# EAGLE board Full (EAGLE 9.6.2), part 1 of 2

Size 160 x 0 mm. Coordinates in mm from the lower left corner, seen from the top.
Outline: 0,0 160,0
Copper layers (1*16): Top 0.035mm / dielectric 1.5mm / Bottom 0.035mm
Design rules "default": minimum track width 6mil, minimum drill 0.35mm, track to track 6mil, track to pad 6mil, pad to pad 6mil, via to via 6mil, smd to smd 6mil, copper to edge 40mil, drill to drill 6mil, minimum pad ring 10mil, minimum via ring 8mil, stop-mask expansion 4mil, vias tented up to drill 0mil, thermal gap 10mil

## Footprints (pad centres in the part's own frame; a part is rotated, then mirrored left to right if it is on the bottom)
DIL14 = drill 0.813 long: 1 -7.62,-3.81; 2 -5.08,-3.81; 3 -2.54,-3.81; 4 0,-3.81; 5 2.54,-3.81; 6 5.08,-3.81; 7 7.62,-3.81; 8 7.62,3.81; 9 5.08,3.81; 10 2.54,3.81; 11 0,3.81; 12 -2.54,3.81; 13 -5.08,3.81; 14 -7.62,3.81
DIL16 = drill 0.813 long: 1 -8.89,-3.81; 2 -6.35,-3.81; 3 -3.81,-3.81; 4 -1.27,-3.81; 5 1.27,-3.81; 6 3.81,-3.81; 7 6.35,-3.81; 8 8.89,-3.81; 9 8.89,3.81; 10 6.35,3.81; 11 3.81,3.81; 12 1.27,3.81; 13 -1.27,3.81; 14 -3.81,3.81; 15 -6.35,3.81; 16 -8.89,3.81
DIL08 = drill 0.813 pad 1.27: 1 -3.81,-3.81; 2 -1.27,-3.81; 3 1.27,-3.81; 4 3.81,-3.81; 5 3.81,3.81; 6 1.27,3.81; 7 -1.27,3.81; 8 -3.81,3.81
E2-5 = drill 0.813 pad 1.27: + -1.016,0 | drill 0.813 pad 1.27 octagon: - 1.016,0
EDG-01 = drill 0.813 long: 1 0,-3.81; 2 0,3.81
B3F-10XX = drill 1.016 long: 1 -3.251,2.261; 2 3.251,2.261; 3 -3.251,-2.261; 4 3.251,-2.261
LED5MM = drill 0.813 octagon: A -1.27,0; K 1.27,0
SSW-111-02-G-S = drill 1 pad 1.5 octagon: 1 -12.7,0; 2 -10.16,0; 3 -7.62,0; 4 -5.08,0; 5 -2.54,0; 6 0,0; 7 2.54,0; 8 5.08,0; 9 7.62,0; 10 10.16,0; 11 12.7,0
RJ9W = drill 0.813 long: A 2.54,0.635; E -2.54,0.635; S 0,0.635
DIL28-6 = drill 0.813 long: 1 -16.51,-7.62; 2 -13.97,-7.62; 3 -11.43,-7.62; 4 -8.89,-7.62; 5 -6.35,-7.62; 6 -3.81,-7.62; 7 -1.27,-7.62; 8 1.27,-7.62; 9 3.81,-7.62; 10 6.35,-7.62; 11 8.89,-7.62; 12 11.43,-7.62; 13 13.97,-7.62; 14 16.51,-7.62; 15 16.51,7.62; 16 13.97,7.62; 17 11.43,7.62; 18 8.89,7.62; 19 6.35,7.62; 20 3.81,7.62; 21 1.27,7.62; 22 -1.27,7.62; 23 -3.81,7.62; 24 -6.35,7.62; 25 -8.89,7.62; 26 -11.43,7.62; 27 -13.97,7.62; 28 -16.51,7.62
SSW-115-02-G-S = drill 1 pad 1.5 octagon: 1 -17.78,0; 2 -15.24,0; 3 -12.7,0; 4 -10.16,0; 5 -7.62,0; 6 -5.08,0; 7 -2.54,0; 8 0,0; 9 2.54,0; 10 5.08,0; 11 7.62,0; 12 10.16,0; 13 12.7,0; 14 15.24,0; 15 17.78,0
LED3MM = drill 0.813 octagon: A -1.27,0; K 1.27,0
228-1277-00-0602J = drill 0.9 long: 1 -16.51,-7.62; 2 -13.97,-7.62; 3 -11.43,-7.62; 4 -8.89,-7.62; 5 -6.35,-7.62; 6 -3.81,-7.62; 7 -1.27,-7.62; 8 1.27,-7.62; 9 3.81,-7.62; 10 6.35,-7.62; 11 8.89,-7.62; 12 11.43,-7.62; 13 13.97,-7.62; 14 16.51,-7.62; 15 16.51,7.62; 16 13.97,7.62; 17 11.43,7.62; 18 8.89,7.62; 19 6.35,7.62; 20 3.81,7.62; 21 1.27,7.62; 22 -1.27,7.62; 23 -3.81,7.62; 24 -6.35,7.62; 25 -8.89,7.62; 26 -11.43,7.62; 27 -13.97,7.62; 28 -16.51,7.62 | hole 2: 21.24,0; -24.74,0
DIL20 = drill 0.813 long: 1 -11.43,-3.81; 2 -8.89,-3.81; 3 -6.35,-3.81; 4 -3.81,-3.81; 5 -1.27,-3.81; 6 1.27,-3.81; 7 3.81,-3.81; 8 6.35,-3.81; 9 8.89,-3.81; 10 11.43,-3.81; 11 11.43,3.81; 12 8.89,3.81; 13 6.35,3.81; 14 3.81,3.81; 15 1.27,3.81; 16 -1.27,3.81; 17 -3.81,3.81; 18 -6.35,3.81; 19 -8.89,3.81; 20 -11.43,3.81
0204/7 = drill 0.813 octagon: 1 -3.81,0; 2 3.81,0
DIL28-4 = drill 0.813 long: 1 -16.51,-5.08; 2 -13.97,-5.08; 3 -11.43,-5.08; 4 -8.89,-5.08; 5 -6.35,-5.08; 6 -3.81,-5.08; 7 -1.27,-5.08; 8 1.27,-5.08; 9 3.81,-5.08; 10 6.35,-5.08; 11 8.89,-5.08; 12 11.43,-5.08; 13 13.97,-5.08; 14 16.51,-5.08; 15 16.51,5.08; 16 13.97,5.08; 17 11.43,5.08; 18 8.89,5.08; 19 6.35,5.08; 20 3.81,5.08; 21 1.27,5.08; 22 -1.27,5.08; 23 -3.81,5.08; 24 -6.35,5.08; 25 -8.89,5.08; 26 -11.43,5.08; 27 -13.97,5.08; 28 -16.51,5.08
SSW-103-02-G-S = drill 1 pad 1.5 octagon: 1 -2.54,0; 2 0,0; 3 2.54,0

## Placement (x,y rotation side)
4_INP_OR_GATE  4072N  [DIL14]  -127,167.64 0 top  (outside the outline)
ADDER_LOWER  74LS283N  [DIL16]  -161.29,167.64 0 top  (outside the outline)
ADDER_UPPER  74LS283N  [DIL16]  -217.17,167.64 0 top  (outside the outline)
ADDR_MEM_REG_LOWER  74LS173N  [DIL16]  46.99,179.07 180 top  (outside the outline)
ADDR_MEM_REG_UPPER  74LS173N  [DIL16]  24.13,179.07 180 top  (outside the outline)
ADDR_REG_A_LOWER  74LS173N  [DIL16]  228.6,231.14 270 top  (outside the outline)
ADDR_REG_A_UPPER  74LS173N  [DIL16]  228.6,254 270 top  (outside the outline)
ADDR_REG_CALC_LOWER  74LS173N  [DIL16]  228.6,177.8 270 top  (outside the outline)
ADDR_REG_CALC_UPPER  74LS173N  [DIL16]  228.6,200.66 270 top  (outside the outline)
ADDR_REG_PARAM_LOWER  74LS173N  [DIL16]  -90.17,86.36 0 top  (outside the outline)
ADDR_REG_PARAM_UPPER  74LS173N  [DIL16]  -184.15,86.36 0 top  (outside the outline)
AND_GATE1_  74LS08N  [DIL14]  -124.46,187.96 0 top  (outside the outline)
AND_GATE2_  74LS08N  [DIL14]  -144.78,187.96 0 top  (outside the outline)
AND_GATE3_  74LS08N  [DIL14]  -165.1,187.96 0 top  (outside the outline)
AND_GATE4_  74LS08N  [DIL14]  -185.42,187.96 0 top  (outside the outline)
AND_GATE_  74LS08N  [DIL14]  29.21,250.19 270 top  (outside the outline)
AUTO_CLOCK  NE555N  [DIL08]  16.51,264.16 0 top  (outside the outline)
BRANCH_SELECTOR  74HC139N  [DIL16]  -204.47,142.24 0 top  (outside the outline)
C1  4.7uF  [E2-5]  15.24,256.54 270 top  (outside the outline)
C2  0.1uF  [E2-5]  15.24,250.19 90 top  (outside the outline)
C3  0.1uF  [E2-5]  -130.81,275.59 0 top  (outside the outline)
CLK_MODE  [EDG-01]  31.75,266.7 180 top  (outside the outline)
CLK_TRIGGER  [B3F-10XX]  6.35,254 270 top  (outside the outline)
CLOCK  [LED5MM]  39.37,242.57 0 top  (outside the outline)
DATABUS_1  LED  [LED5MM]  -186.69,222.25 0 top  (outside the outline)
DATABUS_2  [LED5MM]  -204.47,222.25 0 top  (outside the outline)
DATABUS_3  [LED5MM]  -222.25,222.25 0 top  (outside the outline)
DATABUS_4  [LED5MM]  -240.03,222.25 0 top  (outside the outline)
DATABUS_5  [LED5MM]  -26.67,229.87 0 top  (outside the outline)
DATABUS_6  [LED5MM]  -44.45,229.87 0 top  (outside the outline)
DATABUS_7  [LED5MM]  -62.23,229.87 0 top  (outside the outline)
DATABUS_8  [LED5MM]  -80.01,229.87 0 top  (outside the outline)
EXTENSION  SSW-111-02-G-S  [SSW-111-02-G-S]  -190.5,166.37 0 top  (outside the outline)
FLAG_1  [LED5MM]  -170.18,229.87 0 top  (outside the outline)
FLAG_2  [LED5MM]  -184.15,229.87 0 top  (outside the outline)
FLAG_3  [LED5MM]  -198.12,229.87 0 top  (outside the outline)
FLAG_4  [LED5MM]  -212.09,229.87 0 top  (outside the outline)
FLAG_5  [LED5MM]  -226.06,229.87 0 top  (outside the outline)
FLAG_6  [LED5MM]  -240.03,229.87 0 top  (outside the outline)
FLAG_7  [LED5MM]  -24.13,237.49 0 top  (outside the outline)
FLAG_8  [LED5MM]  -38.1,237.49 0 top  (outside the outline)
FLAG_REG_LOWER  74LS173N  [DIL16]  -69.85,167.64 0 top  (outside the outline)
FLAG_REG_UPPER  74LS173N  [DIL16]  -92.71,167.64 0 top  (outside the outline)
FREQUENCY  100k  [RJ9W]  10.16,278.13 0 top  (outside the outline)
INSRUCTION_REGISTER_SELECTOR_LOWER  74LS157N  [DIL16]  119.38,241.3 90 bottom  (outside the outline)
INSRUCTION_REGISTER_SELECTOR_UPPER  74LS157N  [DIL16]  119.38,218.44 90 bottom  (outside the outline)
INSTRUC_REGISTER_LOWER  74LS173N  [DIL16]  181.61,195.58 270 top  (outside the outline)
INSTRUC_REGISTER_UPPER  74LS173N  [DIL16]  181.61,171.45 270 top  (outside the outline)
INSTRUCTION_MEMORY_LOWER  AT28C64B  [DIL28-6]  154.94,226.06 90 top  (outside the outline)
INSTRUCTION_MEMORY_UPPER  AT28C64B  [DIL28-6]  154.94,184.15 90 top  (outside the outline)
INSTRUCTION_MEMORY_UPPER2  AT28C64B  [DIL28-6]  154.94,142.24 90 top  (outside the outline)
INSTRUCTIONS_EXTENSION  SSW-115-02-G-S  [SSW-115-02-G-S]  -124.46,85.09 0 top  (outside the outline)
INVERTED_CLK_LED  White  [LED5MM]  181.61,127 180 top  (outside the outline)
LED_A_REG_1  [LED5MM]  -74.93,214.63 0 top  (outside the outline)
LED_A_REG_2  [LED5MM]  -95.25,214.63 0 top  (outside the outline)
LED_A_REG_3  [LED5MM]  -115.57,214.63 0 top  (outside the outline)
LED_A_REG_4  [LED5MM]  -135.89,214.63 0 top  (outside the outline)
LED_A_REG_5  [LED5MM]  -156.21,214.63 0 top  (outside the outline)
LED_A_REG_6  [LED5MM]  -176.53,214.63 0 top  (outside the outline)
LED_A_REG_7  [LED5MM]  -196.85,214.63 0 top  (outside the outline)
LED_A_REG_8  [LED5MM]  -217.17,214.63 0 top  (outside the outline)
LED_B_REG_1  [LED5MM]  -237.49,214.63 0 top  (outside the outline)
LED_B_REG_2  [LED5MM]  -29.21,222.25 0 top  (outside the outline)
LED_B_REG_3  [LED5MM]  -49.53,222.25 0 top  (outside the outline)
LED_B_REG_4  [LED5MM]  -69.85,222.25 0 top  (outside the outline)
LED_B_REG_5  [LED5MM]  -90.17,222.25 0 top  (outside the outline)
LED_B_REG_6  [LED5MM]  -110.49,222.25 0 top  (outside the outline)
LED_B_REG_7  [LED5MM]  -130.81,222.25 0 top  (outside the outline)
LED_B_REG_8  [LED5MM]  -151.13,222.25 0 top  (outside the outline)
LOGIC_LED_1  [LED3MM]  -116.84,243.84 0 top  (outside the outline)
LOGIC_LED_2  [LED3MM]  -134.62,243.84 0 top  (outside the outline)
LOGIC_LED_3  [LED3MM]  -152.4,243.84 0 top  (outside the outline)
LOGIC_LED_4  [LED3MM]  -170.18,243.84 0 top  (outside the outline)
LOGIC_LED_5  [LED3MM]  -187.96,243.84 0 top  (outside the outline)
LOGIC_LED_6  [LED3MM]  -205.74,243.84 0 top  (outside the outline)
LOGIC_LED_7  [LED3MM]  -223.52,243.84 0 top  (outside the outline)
LOGIC_LED_8  [LED3MM]  -241.3,243.84 0 top  (outside the outline)
LOGIC_SELECTOR-AND/OR_LOWER  74LS157N  [DIL16]  -229.87,6.35 0 top  (outside the outline)
LOGIC_SELECTOR-AND/OR_UPPER  74LS157N  [DIL16]  -24.13,52.07 0 top  (outside the outline)
LOGIC_SELECTOR-XOR/NOT_LOWER  74LS157N  [DIL16]  -184.15,6.35 0 top  (outside the outline)
LOGIC_SELECTOR-XOR/NOT_UPPER  74LS157N  [DIL16]  -207.01,6.35 0 top  (outside the outline)
MEMORY  228-1277-00-0602J  [228-1277-00-0602J]  38.1,196.85 0 top  (outside the outline)
MICRO_COUNTER_LOWER  74LS161  [DIL16]  130.81,195.58 270 top  (outside the outline)
MICRO_COUNTER_UPPER  74LS161  [DIL16]  130.81,171.45 270 top  (outside the outline)
NOT_GATE1  74LS04N  [DIL14]  39.37,218.44 270 top  (outside the outline)
NOT_GATE2_  74LS04N  [DIL14]  -43.18,187.96 0 top  (outside the outline)
NOT_GATE3_  74LS04N  [DIL14]  -63.5,187.96 0 top  (outside the outline)
NOT_GATE4_  74LS04N  [DIL14]  76.2,257.81 270 top  (outside the outline)
NOT_GATE5_  74LS04N  [DIL14]  -104.14,187.96 0 top  (outside the outline)
NOT_GATE_  74LS04N  [DIL14]  -238.76,187.96 0 top  (outside the outline)
OR_GATE  74LS32N  [DIL14]  -134.62,203.2 0 top  (outside the outline)
OR_GATE1  74LS32N  [DIL14]  76.2,227.33 270 top  (outside the outline)
OR_GATE_2  74LS32N  [DIL14]  -43.18,203.2 0 top  (outside the outline)
OUTPUT_BUFFER_ALU  74LS245N  [DIL20]  -82.55,142.24 0 top  (outside the outline)
OUTPUT_BUFFER_CALC_REG  74LS245N  [DIL20]  205.74,187.96 90 top  (outside the outline)
OUTPUT_BUFFER_FLAGS  74HC245N  [DIL20]  -210.82,115.57 0 top  (outside the outline)
OUTPUT_BUFFER_INSTRUCTION  74LS245N  [DIL20]  124.46,139.7 90 top  (outside the outline)
OUTPUT_BUFFER_LOGIC  74LS245N  [DIL20]  -26.67,142.24 0 top  (outside the outline)
OUTPUT_BUFFER_MEMORY  74LS245N  [DIL20]  76.2,196.85 270 top  (outside the outline)
OUTPUT_BUFFER_PARAM_REG  74LS245N  [DIL20]  -77.47,52.07 0 top  (outside the outline)
OUTPUT_BUFFER_PC  74LS245N  [DIL20]  -156.21,142.24 0 top  (outside the outline)
OUTPUT_BUFFER_RAM  74HC245N  [DIL20]  78.74,74.93 270 top  (outside the outline)
OUTPUT_BUFFER_REG_A  74LS245N  [DIL20]  205.74,243.84 90 top  (outside the outline)
OVERFLOW_FLAG  [LED5MM]  -33.02,214.63 0 top  (outside the outline)
PARAM_LED_1  [LED3MM]  342.9,106.68 0 top  (outside the outline)
PARAM_LED_2  [LED3MM]  325.12,106.68 0 top  (outside the outline)
PARAM_LED_3  [LED3MM]  307.34,106.68 0 top  (outside the outline)
PARAM_LED_4  [LED3MM]  373.38,116.84 0 top  (outside the outline)
PARAM_LED_5  [LED3MM]  355.6,116.84 0 top  (outside the outline)
PARAM_LED_6  [LED3MM]  337.82,116.84 0 top  (outside the outline)
PARAM_LED_7  [LED3MM]  320.04,116.84 0 top  (outside the outline)
PARAM_LED_8  [LED3MM]  302.26,116.84 0 top  (outside the outline)
PC_1  [LED5MM]  -64.77,237.49 0 top  (outside the outline)
PC_2  [LED5MM]  -77.47,237.49 0 top  (outside the outline)
PC_3  [LED5MM]  -90.17,237.49 0 top  (outside the outline)
PC_4  [LED5MM]  -102.87,237.49 0 top  (outside the outline)
PC_5  [LED5MM]  -115.57,237.49 0 top  (outside the outline)
PC_6  [LED5MM]  -128.27,237.49 0 top  (outside the outline)
PC_7  [LED5MM]  -140.97,237.49 0 top  (outside the outline)
PC_8  [LED5MM]  -153.67,237.49 0 top  (outside the outline)
POSITIVE_FLAG  [LED5MM]  -54.61,214.63 0 top  (outside the outline)
PROGRAM_COUNTER_LOWER  74LS161  [DIL16]  -123.19,52.07 0 top  (outside the outline)
PROGRAM_COUNTER_UPPER  74LS161  [DIL16]  -166.37,52.07 0 top  (outside the outline)
R1  1k  [0204/7]  19.05,270.51 180 top  (outside the outline)
R2  1k  [0204/7]  5.08,245.11 0 top  (outside the outline)
R3  10k  [0204/7]  20.32,252.73 90 top  (outside the outline)
R4  220  [0204/7]  25.4,266.7 90 top  (outside the outline)
R5  ~220  [0204/7]  40.64,247.65 0 top  (outside the outline)
R6  ~220  [0204/7]  -191.77,247.65 0 top  (outside the outline)
R7  220  [0204/7]  13.97,273.05 0 top  (outside the outline)
R8  ~220  [0204/7]  -212.09,247.65 0 top  (outside the outline)
R9  ~220  [0204/7]  -222.25,247.65 0 top  (outside the outline)
R10  ~220  [0204/7]  -232.41,247.65 0 top  (outside the outline)
R11  ~220  [0204/7]  -242.57,247.65 0 top  (outside the outline)
R12  ~220  [0204/7]  -17.78,252.73 0 top  (outside the outline)
R13  ~220  [0204/7]  -27.94,252.73 0 top  (outside the outline)
R14  ~220  [0204/7]  -38.1,252.73 0 top  (outside the outline)
R15  ~220  [0204/7]  -48.26,252.73 0 top  (outside the outline)
R16  ~220  [0204/7]  -58.42,252.73 0 top  (outside the outline)
R17  ~220  [0204/7]  -68.58,252.73 0 top  (outside the outline)
R18  ~220  [0204/7]  -78.74,252.73 0 top  (outside the outline)
R19  ~220  [0204/7]  -88.9,252.73 0 top  (outside the outline)
R20  ~220  [0204/7]  -99.06,252.73 0 top  (outside the outline)
R21  ~220  [0204/7]  -109.22,252.73 0 top  (outside the outline)
R22  ~220  [0204/7]  -119.38,252.73 0 top  (outside the outline)
R23  ~220  [0204/7]  -129.54,252.73 0 top  (outside the outline)
R24  ~220  [0204/7]  -139.7,252.73 0 top  (outside the outline)
R25  ~220  [0204/7]  -149.86,252.73 0 top  (outside the outline)
R26  ~220  [0204/7]  -160.02,252.73 0 top  (outside the outline)
R27  ~220  [0204/7]  -170.18,252.73 0 top  (outside the outline)
R28  ~220  [0204/7]  -180.34,252.73 0 top  (outside the outline)
R29  ~220  [0204/7]  -190.5,252.73 0 top  (outside the outline)
R30  ~220  [0204/7]  -200.66,252.73 0 top  (outside the outline)
R31  ~220  [0204/7]  -210.82,252.73 0 top  (outside the outline)
R32  ~220  [0204/7]  63.5,116.84 90 top  (outside the outline)
R33  ~220  [0204/7]  58.42,116.84 90 top  (outside the outline)
R34  ~220  [0204/7]  53.34,116.84 90 top  (outside the outline)
R35  ~220  [0204/7]  48.26,116.84 90 top  (outside the outline)
R36  ~220  [0204/7]  43.18,116.84 90 top  (outside the outline)
R37  ~220  [0204/7]  38.1,116.84 90 top  (outside the outline)
R38  ~220  [0204/7]  33.02,116.84 90 top  (outside the outline)
R39  ~220  [0204/7]  27.94,116.84 90 top  (outside the outline)
R40  ~220  [0204/7]  149.86,97.79 270 top  (outside the outline)
R41  ~220  [0204/7]  157.48,97.79 270 top  (outside the outline)
R42  ~220  [0204/7]  165.1,97.79 270 top  (outside the outline)
R43  ~220  [0204/7]  172.72,97.79 270 top  (outside the outline)
R44  ~220  [0204/7]  180.34,97.79 270 top  (outside the outline)
R45  ~220  [0204/7]  173.99,127 0 top  (outside the outline)
R46  ~220  [0204/7]  -129.54,257.81 0 top  (outside the outline)
R47  ~220  [0204/7]  -139.7,257.81 0 top  (outside the outline)
R48  ~220  [0204/7]  -149.86,257.81 0 top  (outside the outline)
R49  ~220  [0204/7]  -160.02,257.81 0 top  (outside the outline)
R50  ~220  [0204/7]  -170.18,257.81 0 top  (outside the outline)
R51  ~220  [0204/7]  -180.34,257.81 0 top  (outside the outline)
R52  ~220  [0204/7]  -190.5,257.81 0 top  (outside the outline)
R53  ~220  [0204/7]  -200.66,257.81 0 top  (outside the outline)
R54  ~220  [0204/7]  -210.82,257.81 0 top  (outside the outline)
R55  ~220  [0204/7]  -220.98,257.81 0 top  (outside the outline)
R56  ~220  [0204/7]  -231.14,257.81 0 top  (outside the outline)
R57  ~220  [0204/7]  -241.3,257.81 0 top  (outside the outline)
R58  ~220  [0204/7]  -17.78,262.89 0 top  (outside the outline)
R59  ~220  [0204/7]  -27.94,262.89 0 top  (outside the outline)
R60  ~220  [0204/7]  -38.1,262.89 0 top  (outside the outline)
R61  ~220  [0204/7]  -48.26,262.89 0 top  (outside the outline)
R62  ~220  [0204/7]  -58.42,262.89 0 top  (outside the outline)
R63  ~220  [0204/7]  -68.58,262.89 0 top  (outside the outline)
R64  ~220  [0204/7]  -78.74,262.89 0 top  (outside the outline)
R65  ~220  [0204/7]  -88.9,262.89 0 top  (outside the outline)
R66  ~220  [0204/7]  -99.06,262.89 0 top  (outside the outline)
R67  ~220  [0204/7]  -109.22,262.89 0 top  (outside the outline)
R68  ~220  [0204/7]  -119.38,262.89 0 top  (outside the outline)
R69  ~220  [0204/7]  -129.54,262.89 0 top  (outside the outline)
R70  ~220  [0204/7]  -139.7,262.89 0 top  (outside the outline)
R71  ~220  [0204/7]  -149.86,262.89 0 top  (outside the outline)
R72  ~220  [0204/7]  -160.02,262.89 0 top  (outside the outline)
R73  ~220  [0204/7]  -170.18,262.89 0 top  (outside the outline)
R74  ~220  [0204/7]  -180.34,262.89 0 top  (outside the outline)
R75  ~220  [0204/7]  -190.5,262.89 0 top  (outside the outline)
R76  ~220  [0204/7]  -200.66,262.89 0 top  (outside the outline)
R77  ~220  [0204/7]  -210.82,262.89 0 top  (outside the outline)
R78  ~220  [0204/7]  -220.98,262.89 0 top  (outside the outline)
R79  ~220  [0204/7]  -231.14,262.89 0 top  (outside the outline)
R80  ~220  [0204/7]  -241.3,262.89 0 top  (outside the outline)
R81  ~220  [0204/7]  -17.78,267.97 0 top  (outside the outline)
RAM  71256SA15TPG  [DIL28-4]  46.99,72.39 270 top  (outside the outline)
RAM_ADDR_LOWER  74LS173N  [DIL16]  21.59,62.23 90 top  (outside the outline)
RAM_ADDR_UPPER  74LS173N  [DIL16]  21.59,85.09 90 top  (outside the outline)
RAM_LED_1  [LED3MM]  62.23,109.22 0 top  (outside the outline)
RAM_LED_2  [LED3MM]  57.15,109.22 0 top  (outside the outline)
RAM_LED_3  [LED3MM]  52.07,109.22 0 top  (outside the outline)
RAM_LED_4  [LED3MM]  46.99,109.22 0 top  (outside the outline)
RAM_LED_5  [LED3MM]  41.91,109.22 0 top  (outside the outline)
RAM_LED_6  [LED3MM]  36.83,109.22 0 top  (outside the outline)
RAM_LED_7  [LED3MM]  31.75,109.22 0 top  (outside the outline)
RAM_LED_8  [LED3MM]  26.67,109.22 0 top  (outside the outline)
RESET_PC  [B3F-10XX]  -198.12,201.93 0 top  (outside the outline)
RESET_REGS  [B3F-10XX]  -185.42,201.93 0 top  (outside the outline)
SELECTOR_LOGIC2_  74HC139N  [DIL16]  101.6,161.29 90 top  (outside the outline)
SELECTOR_LOGIC_  74HC139N  [DIL16]  137.16,110.49 90 top  (outside the outline)
STEPPER_CLOCK  NE555N  [DIL08]  16.51,242.57 0 top  (outside the outline)
SUBTRACT_INVRTR_LOWER_  74LS86N  [DIL14]  -236.22,52.07 0 top  (outside the outline)
SUBTRACT_INVRTR_LOWER_1  74LS86N  [DIL14]  -101.6,52.07 0 top  (outside the outline)
SUBTRACT_INVRTR_UPPER_  74LS86N  [DIL14]  -45.72,86.36 0 top  (outside the outline)
SUBTRACT_INVRTR_UPPER_1  74LS86N  [DIL14]  -144.78,52.07 0 top  (outside the outline)
USTEP_1  [LED5MM]  151.13,106.68 180 top  (outside the outline)
USTEP_2  [LED5MM]  158.75,106.68 180 top  (outside the outline)
USTEP_3  [LED5MM]  166.37,106.68 180 top  (outside the outline)
USTEP_4  [LED5MM]  173.99,106.68 180 top  (outside the outline)
USTEP_5  [LED5MM]  181.61,106.68 180 top  (outside the outline)
X1  SSW-103-02-G-S  [SSW-103-02-G-S]  -144.78,166.37 0 top  (outside the outline)
XOR_GATE_1  74LS86N  [DIL14]  -238.76,167.64 0 top  (outside the outline)
XOR_GATE_2  74LS86N  [DIL14]  -22.86,187.96 0 top  (outside the outline)
ZERO_FLAG  [LED5MM]  -168.91,222.25 0 top  (outside the outline)
ZERO_POS_FLAG_IDENTIFIER  744078N  [DIL14]  -187.96,52.07 0 top  (outside the outline)

## Library data of the parts
4_INP_OR_GATE = 40xx
ADDER_LOWER ADDER_UPPER ADDR_MEM_REG_LOWER ADDR_MEM_REG_UPPER ADDR_REG_A_LOWER ADDR_REG_A_UPPER ADDR_REG_CALC_LOWER ADDR_REG_CALC_UPPER ADDR_REG_PARAM_LOWER ADDR_REG_PARAM_UPPER AND_GATE1_ AND_GATE2_ AND_GATE3_ AND_GATE4_ AND_GATE_ BRANCH_SELECTOR FLAG_REG_LOWER FLAG_REG_UPPER INSRUCTION_REGISTER_SELECTOR_LOWER INSRUCTION_REGISTER_SELECTOR_UPPER INSTRUC_REGISTER_LOWER INSTRUC_REGISTER_UPPER LOGIC_SELECTOR-AND/OR_LOWER LOGIC_SELECTOR-AND/OR_UPPER LOGIC_SELECTOR-XOR/NOT_LOWER LOGIC_SELECTOR-XOR/NOT_UPPER NOT_GATE1 NOT_GATE2_ NOT_GATE3_ NOT_GATE5_ NOT_GATE_ OR_GATE OR_GATE1 OR_GATE_2 OUTPUT_BUFFER_ALU OUTPUT_BUFFER_CALC_REG OUTPUT_BUFFER_FLAGS OUTPUT_BUFFER_LOGIC OUTPUT_BUFFER_MEMORY OUTPUT_BUFFER_PARAM_REG OUTPUT_BUFFER_PC OUTPUT_BUFFER_RAM OUTPUT_BUFFER_REG_A RAM_ADDR_LOWER RAM_ADDR_UPPER SELECTOR_LOGIC2_ SELECTOR_LOGIC_ SUBTRACT_INVRTR_LOWER_ SUBTRACT_INVRTR_LOWER_1 SUBTRACT_INVRTR_UPPER_ SUBTRACT_INVRTR_UPPER_1 XOR_GATE_1 XOR_GATE_2 = 74xx-eu
AUTO_CLOCK STEPPER_CLOCK = linear
C1-C3 = rcl; SPICEPREFIX: C
CLK_MODE = special
CLK_TRIGGER RESET_PC RESET_REGS = switch-omron; MPN: B3F-1000; OC_FARNELL: 176432; OC_NEWARK: 36M3542
CLOCK DATABUS_1-DATABUS_8 FLAG_1-FLAG_8 INVERTED_CLK_LED LED_A_REG_1-LED_A_REG_8 LED_B_REG_1-LED_B_REG_8 LOGIC_LED_1-LOGIC_LED_8 OVERFLOW_FLAG PARAM_LED_1-PARAM_LED_8 PC_1-PC_8 POSITIVE_FLAG RAM_LED_1-RAM_LED_8 USTEP_1-USTEP_5 ZERO_FLAG = led
EXTENSION = con-samtec; MF: Samtec Inc.; MPN: SSW-111-02-G-S; OC_FARNELL: unknown; OC_NEWARK: 11P9498
FREQUENCY = pot
INSTRUCTION_MEMORY_LOWER INSTRUCTION_MEMORY_UPPER INSTRUCTION_MEMORY_UPPER2 MICRO_COUNTER_LOWER MICRO_COUNTER_UPPER PROGRAM_COUNTER_LOWER PROGRAM_COUNTER_UPPER RAM = ic-package
INSTRUCTIONS_EXTENSION = con-samtec; MF: Samtec Inc.; MPN: SSW-115-02-G-S; OC_FARNELL: unknown; OC_NEWARK: 11P9564
MEMORY = con-3m; MF: 3M; MPN: 228-1277-00-0602J; OC_FARNELL: 9897356; OC_NEWARK: 85K7825
NOT_GATE4_ = 74xx-eu; SPICEPREFIX: B
OUTPUT_BUFFER_INSTRUCTION = 74xx-us
R1-R81 = rcl; SPICEPREFIX: R
X1 = con-samtec; MF: Samtec Inc.; MPN: SSW-103-02-G-S; OC_FARNELL: unknown; OC_NEWARK: 11P9367
ZERO_POS_FLAG_IDENTIFIER = 74ttl-din

## Nets
1_PLACE [Databus]: ADDR_MEM_REG_LOWER.11 ADDR_REG_A_LOWER.11 ADDR_REG_CALC_LOWER.11 ADDR_REG_PARAM_LOWER.11 DATABUS_1.A EXTENSION.1 INSTRUC_REGISTER_LOWER.11 MICRO_COUNTER_LOWER.3 OUTPUT_BUFFER_ALU.2 OUTPUT_BUFFER_CALC_REG.11 OUTPUT_BUFFER_FLAGS.2 OUTPUT_BUFFER_INSTRUCTION.11 OUTPUT_BUFFER_LOGIC.18 OUTPUT_BUFFER_MEMORY.11 OUTPUT_BUFFER_PARAM_REG.11 OUTPUT_BUFFER_PC.11 OUTPUT_BUFFER_RAM.18 OUTPUT_BUFFER_REG_A.11 PROGRAM_COUNTER_LOWER.3 RAM_ADDR_LOWER.14 XOR_GATE_1.2
2_PLACE [Databus]: ADDR_MEM_REG_LOWER.12 ADDR_REG_A_LOWER.12 ADDR_REG_CALC_LOWER.12 ADDR_REG_PARAM_LOWER.12 DATABUS_2.A EXTENSION.2 INSTRUC_REGISTER_LOWER.12 MICRO_COUNTER_LOWER.4 OUTPUT_BUFFER_ALU.3 OUTPUT_BUFFER_CALC_REG.12 OUTPUT_BUFFER_FLAGS.3 OUTPUT_BUFFER_INSTRUCTION.12 OUTPUT_BUFFER_LOGIC.17 OUTPUT_BUFFER_MEMORY.12 OUTPUT_BUFFER_PARAM_REG.12 OUTPUT_BUFFER_PC.12 OUTPUT_BUFFER_RAM.17 OUTPUT_BUFFER_REG_A.12 PROGRAM_COUNTER_LOWER.4 RAM_ADDR_LOWER.13 XOR_GATE_1.5
4_PLACE [Databus]: ADDR_MEM_REG_LOWER.13 ADDR_REG_A_LOWER.13 ADDR_REG_CALC_LOWER.13 ADDR_REG_PARAM_LOWER.13 DATABUS_3.A EXTENSION.3 INSTRUC_REGISTER_LOWER.13 MICRO_COUNTER_LOWER.5 OUTPUT_BUFFER_ALU.4 OUTPUT_BUFFER_CALC_REG.13 OUTPUT_BUFFER_FLAGS.4 OUTPUT_BUFFER_INSTRUCTION.13 OUTPUT_BUFFER_LOGIC.16 OUTPUT_BUFFER_MEMORY.13 OUTPUT_BUFFER_PARAM_REG.13 OUTPUT_BUFFER_PC.13 OUTPUT_BUFFER_RAM.16 OUTPUT_BUFFER_REG_A.13 PROGRAM_COUNTER_LOWER.5 RAM_ADDR_LOWER.12 XOR_GATE_1.10
8_PLACE [Databus]: ADDR_MEM_REG_LOWER.14 ADDR_REG_A_LOWER.14 ADDR_REG_CALC_LOWER.14 ADDR_REG_PARAM_LOWER.14 DATABUS_4.A EXTENSION.4 INSTRUC_REGISTER_LOWER.14 MICRO_COUNTER_LOWER.6 OUTPUT_BUFFER_ALU.5 OUTPUT_BUFFER_CALC_REG.14 OUTPUT_BUFFER_FLAGS.5 OUTPUT_BUFFER_INSTRUCTION.14 OUTPUT_BUFFER_LOGIC.15 OUTPUT_BUFFER_MEMORY.14 OUTPUT_BUFFER_PARAM_REG.14 OUTPUT_BUFFER_PC.14 OUTPUT_BUFFER_RAM.15 OUTPUT_BUFFER_REG_A.14 PROGRAM_COUNTER_LOWER.6 RAM_ADDR_LOWER.11 XOR_GATE_1.13
16_PLACE [Databus]: ADDR_MEM_REG_UPPER.11 ADDR_REG_A_UPPER.11 ADDR_REG_CALC_UPPER.11 ADDR_REG_PARAM_UPPER.11 DATABUS_5.A EXTENSION.5 INSTRUC_REGISTER_UPPER.11 MICRO_COUNTER_UPPER.3 OUTPUT_BUFFER_ALU.6 OUTPUT_BUFFER_CALC_REG.15 OUTPUT_BUFFER_FLAGS.6 OUTPUT_BUFFER_INSTRUCTION.15 OUTPUT_BUFFER_LOGIC.14 OUTPUT_BUFFER_MEMORY.15 OUTPUT_BUFFER_PARAM_REG.15 OUTPUT_BUFFER_PC.15 OUTPUT_BUFFER_RAM.14 OUTPUT_BUFFER_REG_A.15 PROGRAM_COUNTER_UPPER.3 RAM_ADDR_UPPER.14 XOR_GATE_2.2
32_PLACE [Databus]: ADDR_MEM_REG_UPPER.12 ADDR_REG_A_UPPER.12 ADDR_REG_CALC_UPPER.12 ADDR_REG_PARAM_UPPER.12 DATABUS_6.A EXTENSION.6 INSTRUC_REGISTER_UPPER.12 OUTPUT_BUFFER_ALU.7 OUTPUT_BUFFER_CALC_REG.16 OUTPUT_BUFFER_FLAGS.7 OUTPUT_BUFFER_INSTRUCTION.16 OUTPUT_BUFFER_LOGIC.13 OUTPUT_BUFFER_MEMORY.16 OUTPUT_BUFFER_PARAM_REG.16 OUTPUT_BUFFER_PC.16 OUTPUT_BUFFER_RAM.13 OUTPUT_BUFFER_REG_A.16 PROGRAM_COUNTER_UPPER.4 RAM_ADDR_UPPER.13 XOR_GATE_2.5
64_PLACE [Databus]: ADDR_MEM_REG_UPPER.13 ADDR_REG_A_UPPER.13 ADDR_REG_CALC_UPPER.13 ADDR_REG_PARAM_UPPER.13 DATABUS_7.A EXTENSION.7 INSTRUC_REGISTER_UPPER.13 OUTPUT_BUFFER_ALU.8 OUTPUT_BUFFER_CALC_REG.17 OUTPUT_BUFFER_FLAGS.8 OUTPUT_BUFFER_INSTRUCTION.17 OUTPUT_BUFFER_LOGIC.12 OUTPUT_BUFFER_MEMORY.17 OUTPUT_BUFFER_PARAM_REG.17 OUTPUT_BUFFER_PC.17 OUTPUT_BUFFER_RAM.12 OUTPUT_BUFFER_REG_A.17 PROGRAM_COUNTER_UPPER.5 RAM_ADDR_UPPER.12 XOR_GATE_2.10
128_PLACE [Databus]: ADDR_MEM_REG_UPPER.14 ADDR_REG_A_UPPER.14 ADDR_REG_CALC_UPPER.14 ADDR_REG_PARAM_UPPER.14 DATABUS_8.A EXTENSION.8 INSTRUC_REGISTER_UPPER.14 OUTPUT_BUFFER_ALU.9 OUTPUT_BUFFER_CALC_REG.18 OUTPUT_BUFFER_FLAGS.9 OUTPUT_BUFFER_INSTRUCTION.18 OUTPUT_BUFFER_LOGIC.11 OUTPUT_BUFFER_MEMORY.18 OUTPUT_BUFFER_PARAM_REG.18 OUTPUT_BUFFER_PC.18 OUTPUT_BUFFER_RAM.11 OUTPUT_BUFFER_REG_A.18 PROGRAM_COUNTER_UPPER.6 RAM_ADDR_UPPER.11
>0_FLAG: AND_GATE4_.5 POSITIVE_FLAG.A ZERO_POS_FLAG_IDENTIFIER.1
CALC_IN: ADDR_REG_CALC_LOWER.9 ADDR_REG_CALC_LOWER.10 ADDR_REG_CALC_UPPER.9 ADDR_REG_CALC_UPPER.10 SELECTOR_LOGIC2_.10
CALC_OUT: OUTPUT_BUFFER_CALC_REG.19 SELECTOR_LOGIC2_.11
CLOCK: ADDR_MEM_REG_LOWER.7 ADDR_MEM_REG_UPPER.7 ADDR_REG_A_LOWER.7 ADDR_REG_A_UPPER.7 ADDR_REG_CALC_LOWER.7 ADDR_REG_CALC_UPPER.7 ADDR_REG_PARAM_LOWER.7 ADDR_REG_PARAM_UPPER.7 AND_GATE_.8 CLOCK.A EXTENSION.9 FLAG_REG_LOWER.7 FLAG_REG_UPPER.7 INSTRUC_REGISTER_LOWER.7 INSTRUC_REGISTER_UPPER.7 NOT_GATE1.11 PROGRAM_COUNTER_LOWER.2 PROGRAM_COUNTER_UPPER.2 RAM_ADDR_LOWER.7 RAM_ADDR_UPPER.7
CLR_REG: ADDR_MEM_REG_LOWER.15 ADDR_MEM_REG_UPPER.15 ADDR_REG_A_LOWER.15 ADDR_REG_A_UPPER.15 ADDR_REG_CALC_LOWER.15 ADDR_REG_CALC_UPPER.15 ADDR_REG_PARAM_LOWER.15 ADDR_REG_PARAM_UPPER.15 FLAG_REG_LOWER.15 FLAG_REG_UPPER.15 INSTRUC_REGISTER_LOWER.15 INSTRUC_REGISTER_UPPER.15 R81.1 RAM_ADDR_LOWER.15 RAM_ADDR_UPPER.15 RESET_REGS.4
COUNTERS_CLEAR: AND_GATE4_.10 PROGRAM_COUNTER_LOWER.1 PROGRAM_COUNTER_UPPER.1 R80.1 RESET_PC.1
CTRL_SIG_1: INSRUCTION_REGISTER_SELECTOR_LOWER.13 INSTRUCTION_MEMORY_LOWER.11 OUTPUT_BUFFER_INSTRUCTION.2
CTRL_SIG_2: INSRUCTION_REGISTER_SELECTOR_LOWER.10 INSTRUCTION_MEMORY_LOWER.12 OUTPUT_BUFFER_INSTRUCTION.3
CTRL_SIG_3: INSRUCTION_REGISTER_SELECTOR_LOWER.6 INSTRUCTION_MEMORY_LOWER.13 OUTPUT_BUFFER_INSTRUCTION.4
CTRL_SIG_4: INSRUCTION_REGISTER_SELECTOR_LOWER.3 INSTRUCTION_MEMORY_LOWER.15 OUTPUT_BUFFER_INSTRUCTION.5
CTRL_SIG_5: INSRUCTION_REGISTER_SELECTOR_UPPER.13 INSTRUCTION_MEMORY_LOWER.16 OUTPUT_BUFFER_INSTRUCTION.6
CTRL_SIG_6: INSRUCTION_REGISTER_SELECTOR_UPPER.10 INSTRUCTION_MEMORY_LOWER.17 OUTPUT_BUFFER_INSTRUCTION.7
CTRL_SIG_7: INSRUCTION_REGISTER_SELECTOR_UPPER.6 INSTRUCTION_MEMORY_LOWER.18 OUTPUT_BUFFER_INSTRUCTION.8
CTRL_SIG_8: INSRUCTION_REGISTER_SELECTOR_UPPER.3 INSTRUCTION_MEMORY_LOWER.19 OUTPUT_BUFFER_INSTRUCTION.9
CTRL_SIG_9: INSTRUCTION_MEMORY_UPPER.11 SELECTOR_LOGIC2_.13
CTRL_SIG_10: INSTRUCTION_MEMORY_UPPER.12 SELECTOR_LOGIC2_.14
CTRL_SIG_11: INSTRUCTION_MEMORY_UPPER.13 NOT_GATE3_.3
CTRL_SIG_12: ADDER_LOWER.7 INSTRUCTION_MEMORY_UPPER.15 SUBTRACT_INVRTR_LOWER_.1 SUBTRACT_INVRTR_LOWER_.4 SUBTRACT_INVRTR_LOWER_.9 SUBTRACT_INVRTR_LOWER_.12 SUBTRACT_INVRTR_UPPER_.1 SUBTRACT_INVRTR_UPPER_.4 SUBTRACT_INVRTR_UPPER_.9 SUBTRACT_INVRTR_UPPER_.12
CTRL_SIG_13: INSTRUCTION_MEMORY_UPPER.16 NOT_GATE1.13
CTRL_SIG_14: INSTRUCTION_MEMORY_UPPER.17 NOT_GATE4_.11
CTRL_SIG_15: INSTRUCTION_MEMORY_UPPER.18 SELECTOR_LOGIC2_.2
CTRL_SIG_16: INSTRUCTION_MEMORY_UPPER.19 SELECTOR_LOGIC2_.3
CTRL_SIG_17_(FLAG_OUT): INSTRUCTION_MEMORY_UPPER2.11 NOT_GATE_.11
CTRL_SIG_18_(LOGIC_SELECT_1): INSTRUCTION_MEMORY_UPPER2.12 LOGIC_SELECTOR-AND/OR_LOWER.1 LOGIC_SELECTOR-AND/OR_UPPER.1 LOGIC_SELECTOR-XOR/NOT_LOWER.1 LOGIC_SELECTOR-XOR/NOT_UPPER.1 SELECTOR_LOGIC_.2
CTRL_SIG_19_(LOGIC_SELECT_2): INSTRUCTION_MEMORY_UPPER2.13 SELECTOR_LOGIC_.3
CTRL_SIG_20_(LOGIC_OUT): INSTRUCTION_MEMORY_UPPER2.15 NOT_GATE_.13
CTRL_SIG_21_(P_REG_IN): INSTRUCTION_MEMORY_UPPER2.16 NOT_GATE2_.3
CTRL_SIG_22_(P_REG_OUT): INSTRUCTION_MEMORY_UPPER2.17 NOT_GATE2_.1
CTRL_SIG_23_(LOOP_CONTROL_B): BRANCH_SELECTOR.3 INSTRUCTION_MEMORY_UPPER2.18
CTRL_SIG_24_(LOOP_CONTROL_A): BRANCH_SELECTOR.2 INSTRUCTION_MEMORY_UPPER2.19
END_CRNT_CMD: AND_GATE4_.9 SELECTOR_LOGIC2_.9
END_CRNT_CMD&&BTN_PRESS: AND_GATE4_.8 MICRO_COUNTER_LOWER.1 MICRO_COUNTER_UPPER.1
GND: 4_INP_OR_GATE.7 ADDER_LOWER.8 ADDER_UPPER.8 ADDR_MEM_REG_LOWER.1 ADDR_MEM_REG_LOWER.2 ADDR_MEM_REG_LOWER.8 ADDR_MEM_REG_UPPER.1 ADDR_MEM_REG_UPPER.2 ADDR_MEM_REG_UPPER.8 ADDR_REG_A_LOWER.1 ADDR_REG_A_LOWER.2 ADDR_REG_A_LOWER.8 ADDR_REG_A_UPPER.1 ADDR_REG_A_UPPER.2 ADDR_REG_A_UPPER.8 ADDR_REG_CALC_LOWER.1 ADDR_REG_CALC_LOWER.2 ADDR_REG_CALC_LOWER.8 ADDR_REG_CALC_UPPER.1 ADDR_REG_CALC_UPPER.2 ADDR_REG_CALC_UPPER.8 ADDR_REG_PARAM_LOWER.1 ADDR_REG_PARAM_LOWER.2 ADDR_REG_PARAM_LOWER.8 ADDR_REG_PARAM_UPPER.1 ADDR_REG_PARAM_UPPER.2 ADDR_REG_PARAM_UPPER.8 AND_GATE1_.7 AND_GATE2_.7 AND_GATE3_.7 AND_GATE4_.7 AND_GATE_.7 AUTO_CLOCK.1 BRANCH_SELECTOR.1 BRANCH_SELECTOR.8 BRANCH_SELECTOR.15 C1.- C2.- C3.- CLK_TRIGGER.3 EXTENSION.11 FLAG_REG_LOWER.1 FLAG_REG_LOWER.2 FLAG_REG_LOWER.8 FLAG_REG_UPPER.1 FLAG_REG_UPPER.2 FLAG_REG_UPPER.8 INSRUCTION_REGISTER_SELECTOR_LOWER.2 INSRUCTION_REGISTER_SELECTOR_LOWER.5 INSRUCTION_REGISTER_SELECTOR_LOWER.8 INSRUCTION_REGISTER_SELECTOR_LOWER.11 INSRUCTION_REGISTER_SELECTOR_LOWER.14 INSRUCTION_REGISTER_SELECTOR_LOWER.15 INSRUCTION_REGISTER_SELECTOR_UPPER.2 INSRUCTION_REGISTER_SELECTOR_UPPER.5 INSRUCTION_REGISTER_SELECTOR_UPPER.8 INSRUCTION_REGISTER_SELECTOR_UPPER.11 INSRUCTION_REGISTER_SELECTOR_UPPER.14 INSRUCTION_REGISTER_SELECTOR_UPPER.15 INSTRUC_REGISTER_LOWER.1 INSTRUC_REGISTER_LOWER.2 INSTRUC_REGISTER_LOWER.8 INSTRUC_REGISTER_UPPER.1 INSTRUC_REGISTER_UPPER.2 INSTRUC_REGISTER_UPPER.8 INSTRUCTION_MEMORY_LOWER.14 INSTRUCTION_MEMORY_LOWER.20 INSTRUCTION_MEMORY_LOWER.22 INSTRUCTION_MEMORY_UPPER2.14 INSTRUCTION_MEMORY_UPPER2.20 INSTRUCTION_MEMORY_UPPER2.22 INSTRUCTION_MEMORY_UPPER.14 INSTRUCTION_MEMORY_UPPER.20 INSTRUCTION_MEMORY_UPPER.22 INSTRUCTIONS_EXTENSION.15 LOGIC_SELECTOR-AND/OR_LOWER.8 LOGIC_SELECTOR-AND/OR_UPPER.8 LOGIC_SELECTOR-XOR/NOT_LOWER.8 LOGIC_SELECTOR-XOR/NOT_UPPER.8 MEMORY.2 MEMORY.14 MEMORY.20 MEMORY.21 MEMORY.22 MEMORY.23 MEMORY.24 MICRO_COUNTER_LOWER.8 MICRO_COUNTER_UPPER.8 NOT_GATE1.7 NOT_GATE2_.7 NOT_GATE3_.7 NOT_GATE4_.7 NOT_GATE5_.7 NOT_GATE_.7 OR_GATE1.7 OR_GATE.7 OR_GATE_2.7 OUTPUT_BUFFER_ALU.1 OUTPUT_BUFFER_ALU.10 OUTPUT_BUFFER_CALC_REG.10 OUTPUT_BUFFER_FLAGS.1 OUTPUT_BUFFER_FLAGS.10 OUTPUT_BUFFER_INSTRUCTION.10 OUTPUT_BUFFER_LOGIC.10 OUTPUT_BUFFER_MEMORY.10 OUTPUT_BUFFER_PARAM_REG.10 OUTPUT_BUFFER_PC.10 OUTPUT_BUFFER_RAM.10 OUTPUT_BUFFER_REG_A.10 PROGRAM_COUNTER_LOWER.8 PROGRAM_COUNTER_UPPER.8 R4.1 R5.1 R6.2 R8.1 R9.1 R10.1 R11.1 R12.1 R13.1 R14.1 R15.1 R16.2 R17.2 R18.2 R19.2 R20.2 R21.2 R22.2 R23.2 R24.2 R25.2 R26.2 R27.2 R28.2 R29.2 R30.2 R31.2 R32.2 R33.2 R34.2 R35.2 R36.2 R37.2 R38.2 R39.2 R40.1 R41.1 R42.1 R43.1 R44.1 R45.1 R46.2 R47.2 R48.2 R49.2 R50.2 R51.2 R52.2 R53.2 R54.2 R55.2 R56.2 R57.2 R58.2 R59.2 R60.2 R61.2 R62.2 R63.2 R64.2 R65.2 R66.2 R67.2 R68.2 R69.2 R70.2 R71.2 R72.2 R73.2 R74.2 R75.2 R76.2 R77.1 R78.1 R79.1 R81.2 RAM.1 RAM.2 RAM.14 RAM.20 RAM.21 RAM.23 RAM.24 RAM.25 RAM.26 RAM_ADDR_LOWER.1 RAM_ADDR_LOWER.2 RAM_ADDR_LOWER.8 RAM_ADDR_UPPER.1 RAM_ADDR_UPPER.2 RAM_ADDR_UPPER.8 RESET_PC.4 SELECTOR_LOGIC2_.1 SELECTOR_LOGIC2_.8 SELECTOR_LOGIC2_.15 SELECTOR_LOGIC_.1 SELECTOR_LOGIC_.8 SELECTOR_LOGIC_.15 STEPPER_CLOCK.1 SUBTRACT_INVRTR_LOWER_1.7 SUBTRACT_INVRTR_LOWER_.7 SUBTRACT_INVRTR_UPPER_1.7 SUBTRACT_INVRTR_UPPER_.7 X1.1 XOR_GATE_1.7 XOR_GATE_2.7 ZERO_POS_FLAG_IDENTIFIER.7
HLT_SIGNAL: AND_GATE_.9 SELECTOR_LOGIC2_.7
INSTRUCTION__A4: INSTRUC_REGISTER_UPPER.6 INSTRUCTION_MEMORY_LOWER.6 INSTRUCTION_MEMORY_UPPER2.6 INSTRUCTION_MEMORY_UPPER.6 INSTRUCTIONS_EXTENSION.5
INSTRUCTION_A0: INSTRUC_REGISTER_LOWER.6 INSTRUCTION_MEMORY_LOWER.10 INSTRUCTION_MEMORY_UPPER2.10 INSTRUCTION_MEMORY_UPPER.10 INSTRUCTIONS_EXTENSION.1
INSTRUCTION_A1: INSTRUC_REGISTER_LOWER.5 INSTRUCTION_MEMORY_LOWER.9 INSTRUCTION_MEMORY_UPPER2.9 INSTRUCTION_MEMORY_UPPER.9 INSTRUCTIONS_EXTENSION.2
INSTRUCTION_A2: INSTRUC_REGISTER_LOWER.4 INSTRUCTION_MEMORY_LOWER.8 INSTRUCTION_MEMORY_UPPER2.8 INSTRUCTION_MEMORY_UPPER.8 INSTRUCTIONS_EXTENSION.3
INSTRUCTION_A4: INSTRUC_REGISTER_LOWER.3 INSTRUCTION_MEMORY_LOWER.7 INSTRUCTION_MEMORY_UPPER2.7 INSTRUCTION_MEMORY_UPPER.7 INSTRUCTIONS_EXTENSION.4
INSTRUCTION_A5: INSTRUC_REGISTER_UPPER.5 INSTRUCTION_MEMORY_LOWER.5 INSTRUCTION_MEMORY_UPPER2.5 INSTRUCTION_MEMORY_UPPER.5 INSTRUCTIONS_EXTENSION.6
INSTRUCTION_A6: INSTRUC_REGISTER_UPPER.4 INSTRUCTION_MEMORY_LOWER.4 INSTRUCTION_MEMORY_UPPER2.4 INSTRUCTION_MEMORY_UPPER.4 INSTRUCTIONS_EXTENSION.7
INSTRUCTION_A7: INSTRUC_REGISTER_UPPER.3 INSTRUCTION_MEMORY_LOWER.3 INSTRUCTION_MEMORY_UPPER2.3 INSTRUCTION_MEMORY_UPPER.3 INSTRUCTIONS_EXTENSION.8
INSTRUCTION_IN: INSTRUC_REGISTER_LOWER.9 INSTRUC_REGISTER_LOWER.10 INSTRUC_REGISTER_UPPER.9 INSTRUC_REGISTER_UPPER.10 SELECTOR_LOGIC2_.5
INSTRUCTION_OUTPUT: INSRUCTION_REGISTER_SELECTOR_LOWER.1 INSRUCTION_REGISTER_SELECTOR_UPPER.1 OUTPUT_BUFFER_INSTRUCTION.19 SELECTOR_LOGIC2_.6
INV_FLAG_TOGGLE_IN: FLAG_REG_LOWER.9 FLAG_REG_LOWER.10 FLAG_REG_UPPER.9 FLAG_REG_UPPER.10 NOT_GATE1.12
INVERTED_CLOCK: INVERTED_CLK_LED.A MICRO_COUNTER_LOWER.2 MICRO_COUNTER_UPPER.2 NOT_GATE1.10
LOGIC_1: LOGIC_LED_1.A LOGIC_SELECTOR-AND/OR_LOWER.4 LOGIC_SELECTOR-XOR/NOT_LOWER.4 OUTPUT_BUFFER_LOGIC.2
LOGIC_2: LOGIC_LED_2.A LOGIC_SELECTOR-AND/OR_LOWER.7 LOGIC_SELECTOR-XOR/NOT_LOWER.7 OUTPUT_BUFFER_LOGIC.3
LOGIC_3: LOGIC_LED_3.A LOGIC_SELECTOR-AND/OR_LOWER.9 LOGIC_SELECTOR-XOR/NOT_LOWER.9 OUTPUT_BUFFER_LOGIC.4
LOGIC_4: LOGIC_LED_4.A LOGIC_SELECTOR-AND/OR_LOWER.12 LOGIC_SELECTOR-XOR/NOT_LOWER.12 OUTPUT_BUFFER_LOGIC.5
LOGIC_5: LOGIC_LED_5.A LOGIC_SELECTOR-AND/OR_UPPER.4 LOGIC_SELECTOR-XOR/NOT_UPPER.4 OUTPUT_BUFFER_LOGIC.6
LOGIC_6: LOGIC_LED_6.A LOGIC_SELECTOR-AND/OR_UPPER.7 LOGIC_SELECTOR-XOR/NOT_UPPER.7 OUTPUT_BUFFER_LOGIC.7
LOGIC_7: LOGIC_LED_7.A LOGIC_SELECTOR-AND/OR_UPPER.9 LOGIC_SELECTOR-XOR/NOT_UPPER.9 OUTPUT_BUFFER_LOGIC.8
LOGIC_8: LOGIC_LED_8.A LOGIC_SELECTOR-AND/OR_UPPER.12 LOGIC_SELECTOR-XOR/NOT_UPPER.12 OUTPUT_BUFFER_LOGIC.9
MEMORY_IN: INSRUCTION_REGISTER_SELECTOR_LOWER.12 NOT_GATE1.5
MEMORY_OUT: INSRUCTION_REGISTER_SELECTOR_LOWER.9 NOT_GATE1.9
MICRO_A8: INSTRUCTION_MEMORY_LOWER.25 INSTRUCTION_MEMORY_UPPER2.25 INSTRUCTION_MEMORY_UPPER.25 INSTRUCTIONS_EXTENSION.9 MICRO_COUNTER_LOWER.14 USTEP_1.A
MICRO_A9: INSTRUCTION_MEMORY_LOWER.24 INSTRUCTION_MEMORY_UPPER2.24 INSTRUCTION_MEMORY_UPPER.24 INSTRUCTIONS_EXTENSION.10 MICRO_COUNTER_LOWER.13 USTEP_2.A
MICRO_A10: INSTRUCTION_MEMORY_LOWER.21 INSTRUCTION_MEMORY_UPPER2.21 INSTRUCTION_MEMORY_UPPER.21 INSTRUCTIONS_EXTENSION.11 MICRO_COUNTER_LOWER.12 USTEP_4.A
MICRO_A11: INSTRUCTION_MEMORY_LOWER.23 INSTRUCTION_MEMORY_UPPER2.23 INSTRUCTION_MEMORY_UPPER.23 INSTRUCTIONS_EXTENSION.12 MICRO_COUNTER_LOWER.11 USTEP_3.A
MICRO_A12: INSTRUCTION_MEMORY_LOWER.2 INSTRUCTION_MEMORY_UPPER2.2 INSTRUCTION_MEMORY_UPPER.2 INSTRUCTIONS_EXTENSION.13 MICRO_COUNTER_UPPER.14 USTEP_5.A
MODE_SIGNAL: AND_GATE_.4 CLK_MODE.1 NOT_GATE1.3 R4.2
N$1: C2.+ R3.1 STEPPER_CLOCK.6 STEPPER_CLOCK.7
N$2: CLK_TRIGGER.2 R2.2 STEPPER_CLOCK.2
N$3: CLOCK.K R5.2
N$4: AND_GATE_.5 STEPPER_CLOCK.3
N$5: AND_GATE2_.13 SELECTOR_LOGIC_.5
N$6: AND_GATE_.1 AUTO_CLOCK.3
N$7: PARAM_LED_3.K R69.1
N$8: NOT_GATE3_.4 OUTPUT_BUFFER_ALU.19
N$9: AND_GATE_.2 NOT_GATE1.4
N$11: AND_GATE_.10 OR_GATE1.3
N$12: PARAM_LED_2.K R70.1
N$13: AND_GATE_.3 OR_GATE1.1
N$14: AND_GATE_.6 OR_GATE1.2
N$15: PARAM_LED_1.K R71.1
N$16: AUTO_CLOCK.2 AUTO_CLOCK.6 C1.+ R7.2
N$17: PARAM_LED_5.K R72.1
N$18: FLAG_6.A FLAG_REG_LOWER.5 OUTPUT_BUFFER_FLAGS.13 XOR_GATE_2.4
N$19: ADDER_LOWER.6 SUBTRACT_INVRTR_LOWER_.11
N$20: ADDER_LOWER.2 SUBTRACT_INVRTR_LOWER_.8
N$21: ADDER_LOWER.15 SUBTRACT_INVRTR_LOWER_.6
N$22: ADDER_LOWER.11 SUBTRACT_INVRTR_LOWER_.3
N$23: ADDER_UPPER.6 SUBTRACT_INVRTR_UPPER_.11
N$24: ADDER_UPPER.2 SUBTRACT_INVRTR_UPPER_.8
N$25: ADDER_UPPER.15 SUBTRACT_INVRTR_UPPER_.6
N$27: ADDER_UPPER.11 SUBTRACT_INVRTR_UPPER_.3
N$28: OUTPUT_BUFFER_RAM.3 RAM.12 RAM_LED_2.A
N$29: OUTPUT_BUFFER_RAM.4 RAM.13 RAM_LED_3.A
N$30: OUTPUT_BUFFER_RAM.5 RAM.15 RAM_LED_4.A
N$31: OUTPUT_BUFFER_RAM.6 RAM.16 RAM_LED_5.A
N$32: OUTPUT_BUFFER_RAM.7 RAM.17 RAM_LED_6.A
N$33: OUTPUT_BUFFER_RAM.8 RAM.18 RAM_LED_7.A
N$34: OUTPUT_BUFFER_RAM.9 RAM.19 RAM_LED_8.A
N$35: R33.1 RAM_LED_2.K
N$36: AND_GATE4_.1 NOT_GATE2_.6
N$37: NOT_GATE2_.12 OUTPUT_BUFFER_RAM.1 RAM.27
N$38: R34.1 RAM_LED_3.K
N$39: R35.1 RAM_LED_4.K
N$41: FLAG_8.A FLAG_REG_LOWER.3 OUTPUT_BUFFER_FLAGS.11
N$42: FLAG_7.A FLAG_REG_LOWER.4 OUTPUT_BUFFER_FLAGS.12 XOR_GATE_2.9
N$43: BRANCH_SELECTOR.14 INSRUCTION_REGISTER_SELECTOR_LOWER.4
N$44: FLAG_5.A FLAG_REG_LOWER.6 OUTPUT_BUFFER_FLAGS.14 XOR_GATE_2.1
N$45: AND_GATE3_.12 NOT_GATE2_.8
N$46: R36.1 RAM_LED_5.K
N$47: R37.1 RAM_LED_6.K
N$48: BRANCH_SELECTOR.13 INSRUCTION_REGISTER_SELECTOR_LOWER.7
N$49: R38.1 RAM_LED_7.K
N$50: R39.1 RAM_LED_8.K
N$51: FREQUENCY.S R7.1
N$52: R32.1 RAM_LED_1.K
N$53: AND_GATE4_.4 NOT_GATE3_.2
N$54: FLAG_2.A FLAG_REG_UPPER.5 OUTPUT_BUFFER_FLAGS.17 XOR_GATE_1.4
N$55: INSRUCTION_REGISTER_SELECTOR_UPPER.9 SELECTOR_LOGIC_.14
N$57: NOT_GATE4_.4 RAM_ADDR_LOWER.9 RAM_ADDR_LOWER.10 RAM_ADDR_UPPER.9 RAM_ADDR_UPPER.10
N$58: FLAG_REG_LOWER.13 XOR_GATE_2.8
N$59: FLAG_REG_LOWER.12 XOR_GATE_2.6
N$60: FLAG_REG_LOWER.11 XOR_GATE_2.3
N$62: MICRO_COUNTER_LOWER.15 MICRO_COUNTER_UPPER.10
N$64: FLAG_8.K R8.2
N$65: R14.2 ZERO_FLAG.K
N$66: OVERFLOW_FLAG.K R13.2
N$67: POSITIVE_FLAG.K R12.2
N$68: FLAG_5.K R11.2
N$69: FLAG_6.K R10.2
N$70: FLAG_7.K R9.2
N$71: FLAG_3.A FLAG_REG_UPPER.4 OUTPUT_BUFFER_FLAGS.16 XOR_GATE_1.9
N$72: FLAG_1.K R15.2
N$73: OUTPUT_BUFFER_RAM.2 RAM.11 RAM_LED_1.A
N$76: 4_INP_OR_GATE.3 AND_GATE3_.11
N$77: 4_INP_OR_GATE.4 AND_GATE4_.3
N$78: AUTO_CLOCK.7 FREQUENCY.E R1.2
N$79: 4_INP_OR_GATE.5 AND_GATE4_.6
N$80: AND_GATE2_.12 SELECTOR_LOGIC_.4
N$81: NOT_GATE_.12 OUTPUT_BUFFER_LOGIC.19
N$82: LOGIC_SELECTOR-XOR/NOT_UPPER.13 SUBTRACT_INVRTR_LOWER_1.11
N$83: NOT_GATE_.10 OUTPUT_BUFFER_FLAGS.19
N$84: AND_GATE3_.1 SELECTOR_LOGIC_.6
N$85: AND_GATE_.11 LOGIC_SELECTOR-AND/OR_LOWER.2
N$86: LOGIC_SELECTOR-AND/OR_LOWER.3 OR_GATE1.6
N$87: RAM.3 RAM_ADDR_UPPER.6
N$88: RAM.10 RAM_ADDR_LOWER.3
N$89: RAM.9 RAM_ADDR_LOWER.4
N$90: RAM.8 RAM_ADDR_LOWER.5
N$91: RAM.7 RAM_ADDR_LOWER.6
N$92: RAM.6 RAM_ADDR_UPPER.3
N$93: RAM.5 RAM_ADDR_UPPER.4
N$94: RAM.4 RAM_ADDR_UPPER.5
N$95: AND_GATE1_.3 LOGIC_SELECTOR-AND/OR_LOWER.5
N$96: LOGIC_SELECTOR-AND/OR_LOWER.6 OR_GATE1.8
N$97: LOGIC_SELECTOR-AND/OR_LOWER.10 OR_GATE1.11
N$98: AND_GATE1_.6 LOGIC_SELECTOR-AND/OR_LOWER.11
N$99: AND_GATE1_.8 LOGIC_SELECTOR-AND/OR_LOWER.14
N$100: LOGIC_SELECTOR-AND/OR_LOWER.13 OR_GATE.3
N$101: AND_GATE1_.11 LOGIC_SELECTOR-AND/OR_UPPER.2
N$102: LOGIC_SELECTOR-AND/OR_UPPER.3 OR_GATE.6
N$103: AND_GATE2_.3 LOGIC_SELECTOR-AND/OR_UPPER.5
N$104: LOGIC_SELECTOR-AND/OR_UPPER.6 OR_GATE.8
N$105: AND_GATE2_.6 LOGIC_SELECTOR-AND/OR_UPPER.11
N$106: LOGIC_SELECTOR-AND/OR_UPPER.10 OR_GATE.11
N$107: 4_INP_OR_GATE.1 AND_GATE3_.4 AND_GATE3_.9
N$108: AND_GATE2_.8 LOGIC_SELECTOR-AND/OR_UPPER.14
N$109: LOGIC_SELECTOR-AND/OR_UPPER.13 OR_GATE_2.3
N$110: AND_GATE2_.11 LOGIC_SELECTOR-AND/OR_LOWER.15 LOGIC_SELECTOR-AND/OR_UPPER.15
N$111: ADDR_REG_PARAM_LOWER.9 ADDR_REG_PARAM_LOWER.10 ADDR_REG_PARAM_UPPER.9 ADDR_REG_PARAM_UPPER.10 NOT_GATE2_.4
N$112: NOT_GATE2_.2 OUTPUT_BUFFER_PARAM_REG.19
N$114: R40.2 USTEP_1.K
N$115: R41.2 USTEP_2.K
N$116: R42.2 USTEP_3.K
N$117: R43.2 USTEP_4.K
N$118: R44.2 USTEP_5.K
N$119: LED_A_REG_1.K R53.1
N$120: LED_A_REG_2.K R54.1
N$121: LED_A_REG_3.K R55.1
N$122: LED_A_REG_4.K R56.1
N$123: LED_A_REG_5.K R57.1
N$124: LED_A_REG_6.K R58.1
N$125: LOGIC_SELECTOR-XOR/NOT_UPPER.14 NOT_GATE_.8
N$126: LOGIC_SELECTOR-XOR/NOT_UPPER.10 SUBTRACT_INVRTR_LOWER_1.8
N$127: LOGIC_SELECTOR-XOR/NOT_UPPER.11 NOT_GATE_.6
N$128: LOGIC_SELECTOR-XOR/NOT_UPPER.6 SUBTRACT_INVRTR_LOWER_1.6
N$129: LOGIC_SELECTOR-XOR/NOT_UPPER.5 NOT_GATE_.4
N$130: LOGIC_SELECTOR-XOR/NOT_UPPER.3 SUBTRACT_INVRTR_LOWER_1.3
N$131: DATABUS_1.K R24.1
N$132: INVERTED_CLK_LED.K R45.2
N$133: DATABUS_2.K R25.1
N$134: DATABUS_3.K R26.1
N$135: DATABUS_4.K R27.1
N$136: DATABUS_5.K R28.1
N$137: DATABUS_6.K R29.1
N$138: DATABUS_7.K R30.1
N$140: DATABUS_8.K R31.1
N$141: LOGIC_SELECTOR-XOR/NOT_UPPER.2 NOT_GATE_.2
N$142: LOGIC_SELECTOR-XOR/NOT_LOWER.13 SUBTRACT_INVRTR_UPPER_1.11
N$143: LOGIC_SELECTOR-XOR/NOT_LOWER.10 SUBTRACT_INVRTR_UPPER_1.8
N$144: LOGIC_SELECTOR-XOR/NOT_LOWER.6 SUBTRACT_INVRTR_UPPER_1.6
N$145: LOGIC_SELECTOR-XOR/NOT_LOWER.3 SUBTRACT_INVRTR_UPPER_1.3
N$146: LOGIC_SELECTOR-XOR/NOT_LOWER.14 NOT_GATE3_.12
N$147: LOGIC_SELECTOR-XOR/NOT_LOWER.11 NOT_GATE3_.10
N$148: LOGIC_SELECTOR-XOR/NOT_LOWER.5 NOT_GATE3_.8
N$149: ADDR_MEM_REG_LOWER.6 MEMORY.10
N$150: ADDR_MEM_REG_LOWER.5 MEMORY.9
N$151: ADDR_MEM_REG_LOWER.4 MEMORY.8
N$152: ADDR_MEM_REG_LOWER.3 MEMORY.7
N$153: ADDR_MEM_REG_UPPER.6 MEMORY.6
N$154: ADDR_MEM_REG_UPPER.5 MEMORY.5
N$155: ADDR_MEM_REG_UPPER.4 MEMORY.4
N$156: ADDR_MEM_REG_UPPER.3 MEMORY.3
N$157: MEMORY.13 OUTPUT_BUFFER_MEMORY.7
N$158: MEMORY.12 OUTPUT_BUFFER_MEMORY.8
N$159: MEMORY.11 OUTPUT_BUFFER_MEMORY.9
N$160: MEMORY.15 OUTPUT_BUFFER_MEMORY.6
N$161: MEMORY.16 OUTPUT_BUFFER_MEMORY.5
N$162: MEMORY.17 OUTPUT_BUFFER_MEMORY.4
N$163: MEMORY.18 OUTPUT_BUFFER_MEMORY.3
N$164: MEMORY.19 OUTPUT_BUFFER_MEMORY.2
N$165: LOGIC_SELECTOR-XOR/NOT_LOWER.2 NOT_GATE3_.6
N$167: AND_GATE3_.3 LOGIC_SELECTOR-XOR/NOT_LOWER.15 LOGIC_SELECTOR-XOR/NOT_UPPER.15
N$168: AND_GATE3_.2 SELECTOR_LOGIC_.7
N$169: LED_A_REG_7.K R59.1
N$170: PROGRAM_COUNTER_LOWER.15 PROGRAM_COUNTER_UPPER.10
N$171: OUTPUT_BUFFER_PC.9 PC_1.A PROGRAM_COUNTER_LOWER.14
N$172: OUTPUT_BUFFER_PC.8 PC_2.A PROGRAM_COUNTER_LOWER.13
N$173: OUTPUT_BUFFER_PC.7 PC_3.A PROGRAM_COUNTER_LOWER.12
N$174: OUTPUT_BUFFER_PC.6 PC_4.A PROGRAM_COUNTER_LOWER.11
N$175: OUTPUT_BUFFER_PC.4 PC_6.A PROGRAM_COUNTER_UPPER.13
N$176: LED_A_REG_8.K R60.1
N$177: PC_1.K R16.1
N$178: PC_2.K R17.1
N$179: PC_3.K R18.1
N$180: PC_4.K R19.1
N$181: PC_5.K R20.1
N$182: PC_6.K R21.1
N$183: PC_7.K R22.1
N$184: PC_8.K R23.1
N$185: LED_B_REG_1.K R61.1
N$186: LED_B_REG_2.K R62.1
N$187: LED_B_REG_3.K R63.1
N$188: LED_B_REG_4.K R64.1
N$189: LED_B_REG_5.K R65.1
N$190: LOGIC_LED_7.K R6.1
N$191: LED_B_REG_6.K R66.1
N$192: LOGIC_LED_6.K R46.1
N$193: LOGIC_LED_5.K R47.1
N$194: OUTPUT_BUFFER_PC.3 PC_7.A PROGRAM_COUNTER_UPPER.12
N$195: OUTPUT_BUFFER_PC.5 PC_5.A PROGRAM_COUNTER_UPPER.14
N$196: OUTPUT_BUFFER_PC.2 PC_8.A PROGRAM_COUNTER_UPPER.11
N$197: LOGIC_LED_4.K R48.1
N$198: LOGIC_LED_3.K R49.1
N$199: LOGIC_LED_2.K R50.1
N$200: LOGIC_LED_1.K R51.1
N$201: LOGIC_LED_8.K R52.1
N$202: LED_B_REG_7.K R67.1
N$203: LED_B_REG_8.K R68.1
N$204: PARAM_LED_6.K R73.1
N$205: PARAM_LED_7.K R74.1
N$206: PARAM_LED_8.K R75.1
N$207: PARAM_LED_4.K R76.1
N$209: 4_INP_OR_GATE.2 NOT_GATE4_.2
N$212: INSRUCTION_REGISTER_SELECTOR_UPPER.12 SELECTOR_LOGIC_.13
N$217: FLAG_4.A FLAG_REG_UPPER.3 OUTPUT_BUFFER_FLAGS.15 XOR_GATE_1.12
N$219: FLAG_REG_UPPER.11 XOR_GATE_1.3
N$220: FLAG_REG_UPPER.12 XOR_GATE_1.6
N$221: FLAG_REG_UPPER.13 XOR_GATE_1.8
N$222: FLAG_REG_UPPER.14 XOR_GATE_1.11
N$223: NOT_GATE4_.10 OUTPUT_BUFFER_RAM.19
N$225: AND_GATE3_.5 NOT_GATE4_.12
N$226: AND_GATE3_.10 NOT_GATE5_.2
N$227: FLAG_2.K R77.2
N$228: FLAG_3.K R78.2
N$229: FLAG_4.K R79.2
OF_SELECTED: BRANCH_SELECTOR.5 NOT_GATE2_.9
OVERFLOW_FLAG: ADDER_UPPER.9 AND_GATE3_.13 FLAG_REG_LOWER.14 OVERFLOW_FLAG.A
PC_INC: NOT_GATE2_.11 SELECTOR_LOGIC_.9
PC_LOAD: AND_GATE3_.8 NOT_GATE4_.5
PC_LOAD_SIGNAL: NOT_GATE5_.1 SELECTOR_LOGIC_.11
PC_OUT: OUTPUT_BUFFER_PC.19 SELECTOR_LOGIC_.10
PF_SELECTED: BRANCH_SELECTOR.7 NOT_GATE3_.1
RAM_ADDR_IN: INSRUCTION_REGISTER_SELECTOR_UPPER.4 NOT_GATE4_.3
RAM_WRITE: INSRUCTION_REGISTER_SELECTOR_UPPER.7 NOT_GATE2_.13 RAM.22
REG_A_1PLACE: ADDER_LOWER.5 ADDR_REG_A_LOWER.6 AND_GATE_.12 LED_A_REG_1.A NOT_GATE3_.5 OR_GATE1.4 OUTPUT_BUFFER_REG_A.9 SUBTRACT_INVRTR_UPPER_1.2 ZERO_POS_FLAG_IDENTIFIER.5
REG_A_2PLACE: ADDER_LOWER.3 ADDR_REG_A_LOWER.5 AND_GATE1_.1 LED_A_REG_2.A NOT_GATE3_.9 OR_GATE1.10 OUTPUT_BUFFER_REG_A.8 SUBTRACT_INVRTR_UPPER_1.5 ZERO_POS_FLAG_IDENTIFIER.4
REG_A_4PLACE: ADDER_LOWER.14 ADDR_REG_A_LOWER.4 AND_GATE1_.4 LED_A_REG_3.A NOT_GATE3_.11 OR_GATE1.13 OUTPUT_BUFFER_REG_A.7 SUBTRACT_INVRTR_UPPER_1.10 ZERO_POS_FLAG_IDENTIFIER.3
REG_A_8PLACE: ADDER_LOWER.12 ADDR_REG_A_LOWER.3 AND_GATE1_.9 LED_A_REG_4.A NOT_GATE3_.13 OR_GATE.2 OUTPUT_BUFFER_REG_A.6 SUBTRACT_INVRTR_UPPER_1.13 ZERO_POS_FLAG_IDENTIFIER.2
REG_A_16PLACE: ADDER_UPPER.5 ADDR_REG_A_UPPER.6 AND_GATE1_.12 LED_A_REG_5.A NOT_GATE_.1 OR_GATE.5 OUTPUT_BUFFER_REG_A.5 SUBTRACT_INVRTR_LOWER_1.2 ZERO_POS_FLAG_IDENTIFIER.9
REG_A_32PLACE: ADDER_UPPER.3 ADDR_REG_A_UPPER.5 AND_GATE2_.1 LED_A_REG_6.A NOT_GATE_.3 OR_GATE.10 OUTPUT_BUFFER_REG_A.4 SUBTRACT_INVRTR_LOWER_1.5 ZERO_POS_FLAG_IDENTIFIER.10
REG_A_64PLACE: ADDER_UPPER.14 ADDR_REG_A_UPPER.4 AND_GATE2_.5 LED_A_REG_7.A NOT_GATE_.5 OR_GATE.12 OUTPUT_BUFFER_REG_A.3 SUBTRACT_INVRTR_LOWER_1.10 ZERO_POS_FLAG_IDENTIFIER.11
REG_A_128PLACE: ADDER_UPPER.12 ADDR_REG_A_UPPER.3 AND_GATE2_.9 LED_A_REG_8.A NOT_GATE_.9 OR_GATE_2.2 OUTPUT_BUFFER_REG_A.2 SUBTRACT_INVRTR_LOWER_1.13 ZERO_POS_FLAG_IDENTIFIER.12
REG_A_IN: ADDR_REG_A_LOWER.9 ADDR_REG_A_LOWER.10 ADDR_REG_A_UPPER.9 ADDR_REG_A_UPPER.10 BRANCH_SELECTOR.10
REG_A_OUT: BRANCH_SELECTOR.11 OUTPUT_BUFFER_REG_A.19
REG_B_1PLACE: ADDR_REG_CALC_LOWER.6 AND_GATE_.13 LED_B_REG_1.A OR_GATE1.5 OUTPUT_BUFFER_CALC_REG.9 SUBTRACT_INVRTR_LOWER_.13 SUBTRACT_INVRTR_UPPER_1.1
REG_B_2PLACE: ADDR_REG_CALC_LOWER.5 AND_GATE1_.2 LED_B_REG_2.A OR_GATE1.9 OUTPUT_BUFFER_CALC_REG.8 SUBTRACT_INVRTR_LOWER_.10 SUBTRACT_INVRTR_UPPER_1.4
REG_B_4PLACE: ADDR_REG_CALC_LOWER.4 AND_GATE1_.5 LED_B_REG_3.A OR_GATE1.12 OUTPUT_BUFFER_CALC_REG.7 SUBTRACT_INVRTR_LOWER_.5 SUBTRACT_INVRTR_UPPER_1.9
REG_B_8PLACE: ADDR_REG_CALC_LOWER.3 AND_GATE1_.10 LED_B_REG_4.A OR_GATE.1 OUTPUT_BUFFER_CALC_REG.6 SUBTRACT_INVRTR_LOWER_.2 SUBTRACT_INVRTR_UPPER_1.12
REG_B_16PLACE: ADDR_REG_CALC_UPPER.6 AND_GATE1_.13 LED_B_REG_5.A OR_GATE.4 OUTPUT_BUFFER_CALC_REG.5 SUBTRACT_INVRTR_LOWER_1.1 SUBTRACT_INVRTR_UPPER_.13
REG_B_32PLACE: ADDR_REG_CALC_UPPER.5 AND_GATE2_.2 LED_B_REG_6.A OR_GATE.9 OUTPUT_BUFFER_CALC_REG.4 SUBTRACT_INVRTR_LOWER_1.4 SUBTRACT_INVRTR_UPPER_.10
REG_B_64PLACE: ADDR_REG_CALC_UPPER.4 AND_GATE2_.4 LED_B_REG_7.A OR_GATE.13 OUTPUT_BUFFER_CALC_REG.3 SUBTRACT_INVRTR_LOWER_1.9 SUBTRACT_INVRTR_UPPER_.5
REG_B_128PLACE: ADDR_REG_CALC_UPPER.3 AND_GATE2_.10 LED_B_REG_8.A OR_GATE_2.1 OUTPUT_BUFFER_CALC_REG.2 SUBTRACT_INVRTR_LOWER_1.12 SUBTRACT_INVRTR_UPPER_.2
REG_P_1PLACE: ADDR_REG_PARAM_LOWER.6 OUTPUT_BUFFER_PARAM_REG.9 PARAM_LED_1.A
REG_P_2PLACE: ADDR_REG_PARAM_LOWER.5 OUTPUT_BUFFER_PARAM_REG.8 PARAM_LED_2.A
REG_P_4PLACE: ADDR_REG_PARAM_LOWER.4 OUTPUT_BUFFER_PARAM_REG.7 PARAM_LED_3.A
REG_P_8PLACE: ADDR_REG_PARAM_LOWER.3 OUTPUT_BUFFER_PARAM_REG.6 PARAM_LED_4.A
REG_P_16PLACE: ADDR_REG_PARAM_UPPER.6 OUTPUT_BUFFER_PARAM_REG.5 PARAM_LED_5.A
REG_P_32PLACE: ADDR_REG_PARAM_UPPER.5 OUTPUT_BUFFER_PARAM_REG.4 PARAM_LED_6.A
REG_P_64PLACE: ADDR_REG_PARAM_UPPER.4 OUTPUT_BUFFER_PARAM_REG.3 PARAM_LED_7.A
REG_P_128PLACE: ADDR_REG_PARAM_UPPER.3 OUTPUT_BUFFER_PARAM_REG.2 PARAM_LED_8.A
SUB_COUNTER_LOAD: AND_GATE3_.6 NOT_GATE4_.9
SUB_LOAD_SIGNAL: BRANCH_SELECTOR.9 NOT_GATE4_.13
SUM_1: ADDER_LOWER.4 OUTPUT_BUFFER_ALU.18
SUM_2: ADDER_LOWER.1 OUTPUT_BUFFER_ALU.17
SUM_4: ADDER_LOWER.13 OUTPUT_BUFFER_ALU.16
SUM_8: ADDER_LOWER.10 OUTPUT_BUFFER_ALU.15
SUM_16: ADDER_UPPER.4 OUTPUT_BUFFER_ALU.14
SUM_32: ADDER_UPPER.1 OUTPUT_BUFFER_ALU.13
SUM_64: ADDER_UPPER.13 OUTPUT_BUFFER_ALU.12
SUM_128: ADDER_UPPER.10 OUTPUT_BUFFER_ALU.11
SUM_CARRY: ADDER_LOWER.9 ADDER_UPPER.7
UNCONDITIONAL_SELECTED: BRANCH_SELECTOR.4 NOT_GATE4_.1
VCC: 4_INP_OR_GATE.14 ADDER_LOWER.16 ADDER_UPPER.16 ADDR_MEM_REG_LOWER.16 ADDR_MEM_REG_UPPER.16 ADDR_REG_A_LOWER.16 ADDR_REG_A_UPPER.16 ADDR_REG_CALC_LOWER.16 ADDR_REG_CALC_UPPER.16 ADDR_REG_PARAM_LOWER.16 ADDR_REG_PARAM_UPPER.16 AND_GATE1_.14 AND_GATE2_.14 AND_GATE3_.14 AND_GATE4_.14 AND_GATE_.14 AUTO_CLOCK.4 AUTO_CLOCK.8 BRANCH_SELECTOR.16 C3.+ CLK_MODE.2 EXTENSION.10 FLAG_REG_LOWER.16 FLAG_REG_UPPER.16 INSRUCTION_REGISTER_SELECTOR_LOWER.16 INSRUCTION_REGISTER_SELECTOR_UPPER.16 INSTRUC_REGISTER_LOWER.16 INSTRUC_REGISTER_UPPER.16 INSTRUCTION_MEMORY_LOWER.27 INSTRUCTION_MEMORY_LOWER.28 INSTRUCTION_MEMORY_UPPER2.27 INSTRUCTION_MEMORY_UPPER2.28 INSTRUCTION_MEMORY_UPPER.27 INSTRUCTION_MEMORY_UPPER.28 INSTRUCTIONS_EXTENSION.14 LOGIC_SELECTOR-AND/OR_LOWER.16 LOGIC_SELECTOR-AND/OR_UPPER.16 LOGIC_SELECTOR-XOR/NOT_LOWER.16 LOGIC_SELECTOR-XOR/NOT_UPPER.16 MEMORY.27 MEMORY.28 MICRO_COUNTER_LOWER.7 MICRO_COUNTER_LOWER.10 MICRO_COUNTER_LOWER.16 MICRO_COUNTER_UPPER.7 MICRO_COUNTER_UPPER.16 NOT_GATE1.14 NOT_GATE2_.14 NOT_GATE3_.14 NOT_GATE4_.14 NOT_GATE5_.14 NOT_GATE_.14 OR_GATE1.14 OR_GATE.14 OR_GATE_2.14 OUTPUT_BUFFER_ALU.20 OUTPUT_BUFFER_CALC_REG.1 OUTPUT_BUFFER_CALC_REG.20 OUTPUT_BUFFER_FLAGS.20 OUTPUT_BUFFER_INSTRUCTION.1 OUTPUT_BUFFER_INSTRUCTION.20 OUTPUT_BUFFER_LOGIC.1 OUTPUT_BUFFER_LOGIC.20 OUTPUT_BUFFER_MEMORY.1 OUTPUT_BUFFER_MEMORY.20 OUTPUT_BUFFER_PARAM_REG.1 OUTPUT_BUFFER_PARAM_REG.20 OUTPUT_BUFFER_PC.1 OUTPUT_BUFFER_PC.20 OUTPUT_BUFFER_RAM.20 OUTPUT_BUFFER_REG_A.1 OUTPUT_BUFFER_REG_A.20 PROGRAM_COUNTER_LOWER.7 PROGRAM_COUNTER_LOWER.16 PROGRAM_COUNTER_UPPER.7 PROGRAM_COUNTER_UPPER.16 R1.1 R2.1 R3.2 R80.2 RAM.28 RAM_ADDR_LOWER.16 RAM_ADDR_UPPER.16 RESET_REGS.1 SELECTOR_LOGIC2_.16 SELECTOR_LOGIC_.16 STEPPER_CLOCK.8 SUBTRACT_INVRTR_LOWER_1.14 SUBTRACT_INVRTR_LOWER_.14 SUBTRACT_INVRTR_UPPER_1.14 SUBTRACT_INVRTR_UPPER_.14 X1.2 XOR_GATE_1.14 XOR_GATE_2.14 ZERO_POS_FLAG_IDENTIFIER.14
ZERO_FLAG: AND_GATE4_.2 ZERO_FLAG.A ZERO_POS_FLAG_IDENTIFIER.13
ZF_SELECTED: BRANCH_SELECTOR.6 NOT_GATE2_.5
~DATA/PARAM: FLAG_1.A FLAG_REG_UPPER.6 MEMORY.25 OUTPUT_BUFFER_FLAGS.18 XOR_GATE_1.1
~MEMORY_IN: ADDR_MEM_REG_LOWER.9 ADDR_MEM_REG_LOWER.10 ADDR_MEM_REG_UPPER.9 ADDR_MEM_REG_UPPER.10 NOT_GATE1.6
~MEMORY_OUT: NOT_GATE1.8 OUTPUT_BUFFER_MEMORY.19
~PC_INC: NOT_GATE2_.10 PROGRAM_COUNTER_LOWER.10
~PC_LOAD: NOT_GATE4_.6 PROGRAM_COUNTER_LOWER.9 PROGRAM_COUNTER_UPPER.9
~SUB_COUNTER_LOAD: MICRO_COUNTER_LOWER.9 MICRO_COUNTER_UPPER.9 NOT_GATE4_.8